# EAGLE board Template (EAGLE 9.6.2)

Size 20.32 x 25.4 mm. Coordinates in mm from the lower left corner, seen from the top.
Outline: 0,0 20.32,0 20.32,25.4 0,25.4 0,0
Copper layers (1*16): Top 0.035mm / dielectric 1.5mm / Bottom 0.035mm
Design rules "default": minimum track width 6mil, minimum drill 0.35mm, track to track 6mil, track to pad 6mil, pad to pad 6mil, via to via 6mil, smd to smd 6mil, copper to edge 40mil, drill to drill 6mil, minimum pad ring 10mil, minimum via ring 8mil, stop-mask expansion 4mil, vias tented up to drill 0mil, thermal gap 10mil

## Footprints (pad centres in the part's own frame; a part is rotated, then mirrored left to right if it is on the bottom)
1,6/0,9 = drill 0.914 pad 1.6 octagon: 1 0,0

## Placement (x,y rotation side)
3V3  [1,6/0,9]  2.54,17.78 0 top
5V  [1,6/0,9]  2.54,22.86 0 top
GND  [1,6/0,9]  2.54,20.32 0 top
GP0  [1,6/0,9]  17.78,22.86 0 top
GP1  [1,6/0,9]  17.78,20.32 0 top
GP2  [1,6/0,9]  17.78,17.78 0 top
GP3  [1,6/0,9]  17.78,15.24 0 top
GP4  [1,6/0,9]  17.78,12.7 0 top
GP5  [1,6/0,9]  17.78,10.16 0 top
GP6  [1,6/0,9]  17.78,7.62 0 top
GP7  [1,6/0,9]  17.78,5.08 0 top
GP8  [1,6/0,9]  17.78,2.5 0 top
GP09  [1,6/0,9]  15.24,2.54 0 top
GP10  [1,6/0,9]  12.7,2.54 0 top
GP11  [1,6/0,9]  10.16,2.54 0 top
GP12  [1,6/0,9]  7.62,2.54 0 top
GP13  [1,6/0,9]  5.08,2.54 0 top
GP14  [1,6/0,9]  2.54,2.54 0 top
GP15  [1,6/0,9]  2.54,5.08 0 top
GP26  [1,6/0,9]  2.54,7.62 0 top
GP27  [1,6/0,9]  2.54,10.16 0 top
GP28  [1,6/0,9]  2.54,12.7 0 top
GP29  [1,6/0,9]  2.54,15.24 0 top

## Library data of the parts
3V3 5V GND GP0 GP1-GP8 GP09 GP10-GP15 GP26-GP29 = Codeworks-Pads